# Altium PCB Antenna_915Mhz.PcbDoc
Units mil, origin at the board's own origin, x right, y up, seen from the top; angles counter-clockwise.
Board outline 1782 x 1899 mil, 2 copper layers (Top Layer, Bottom Layer); 5 components, 3 nets, 12 pads, 80 vias.
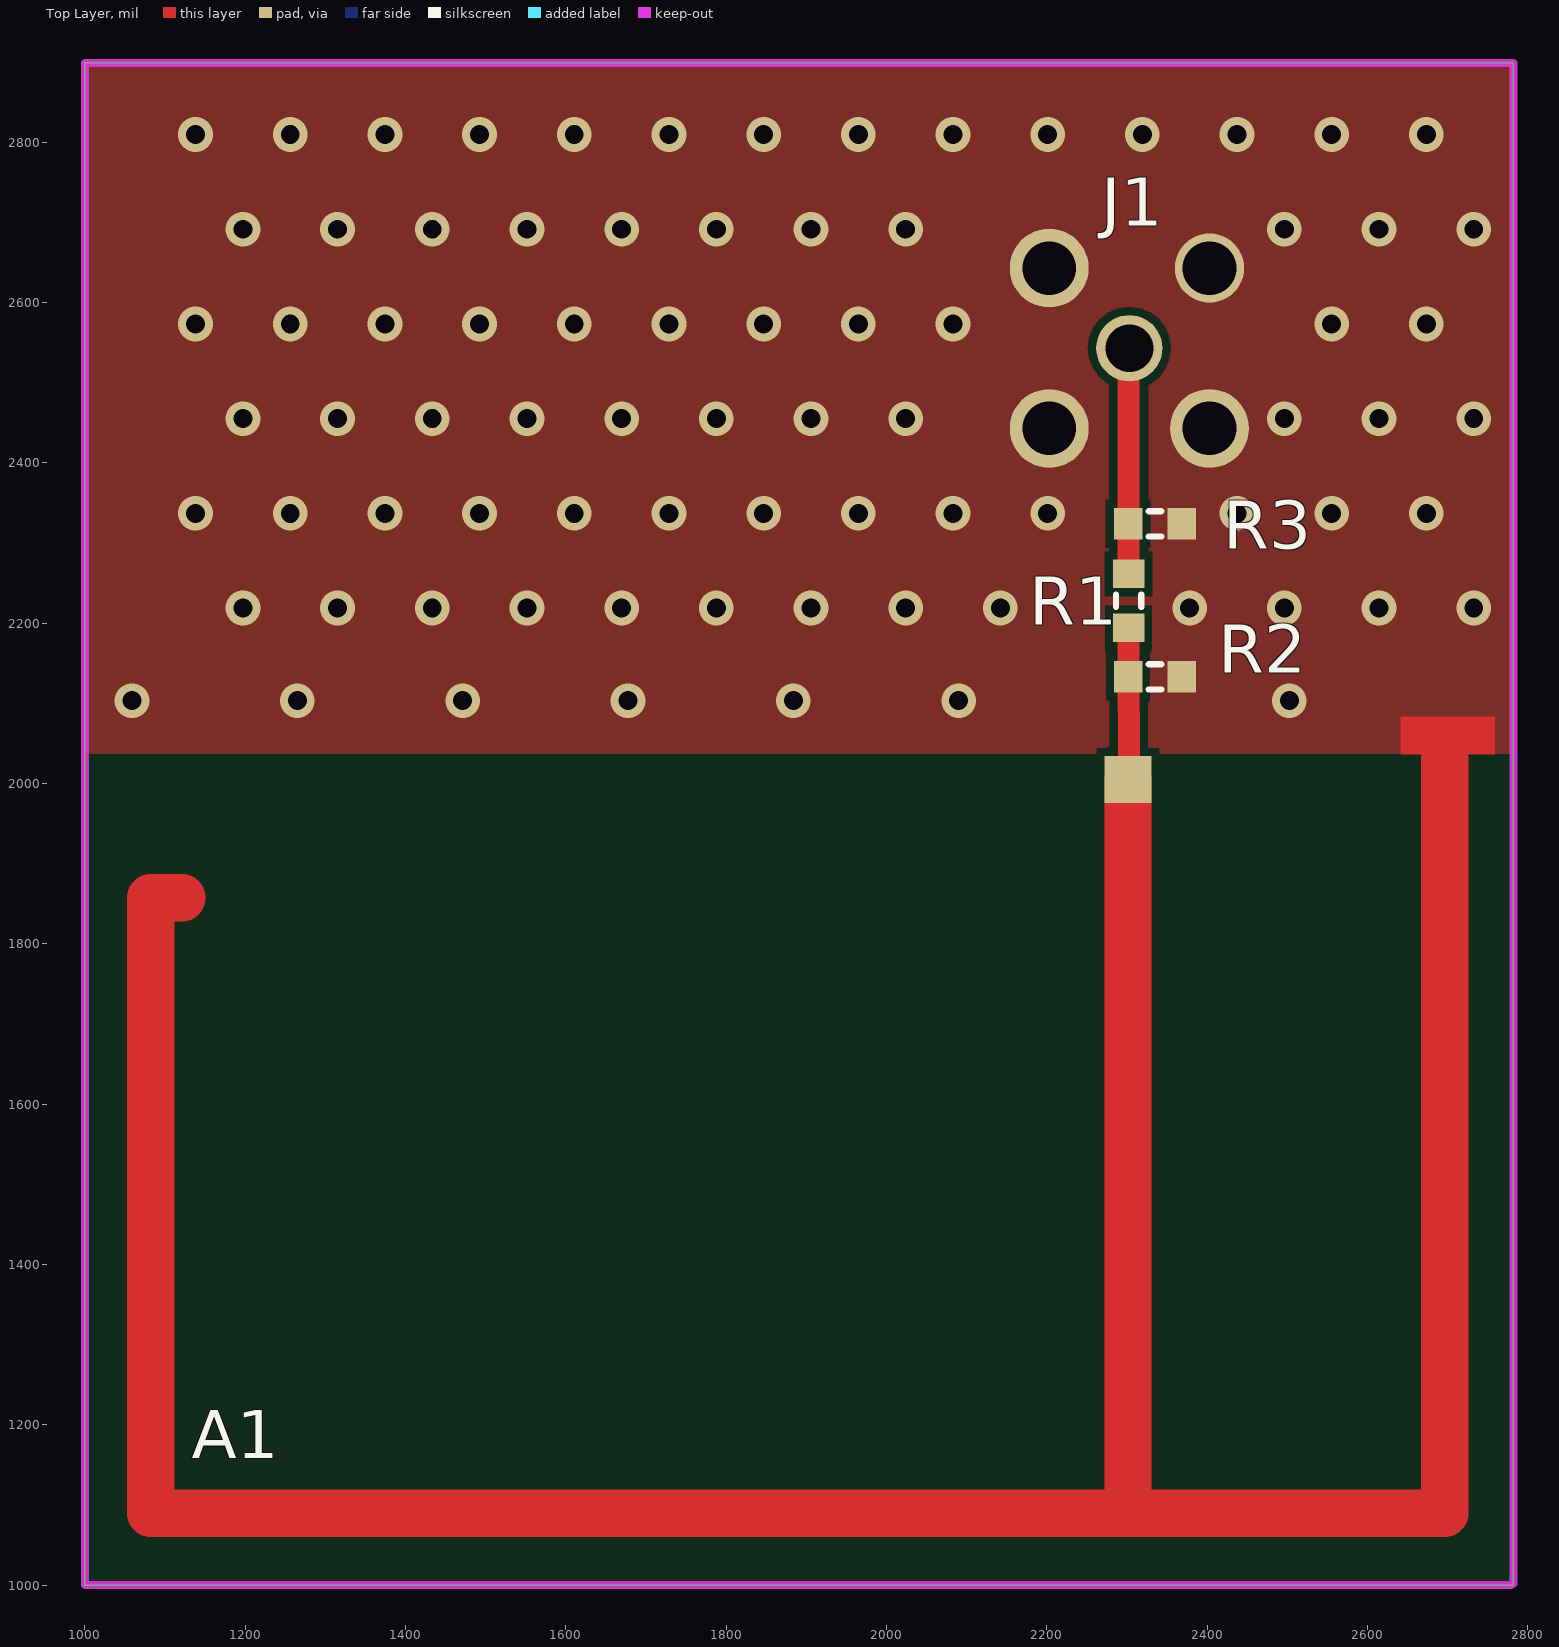
[diagram p0: Top Layer view]
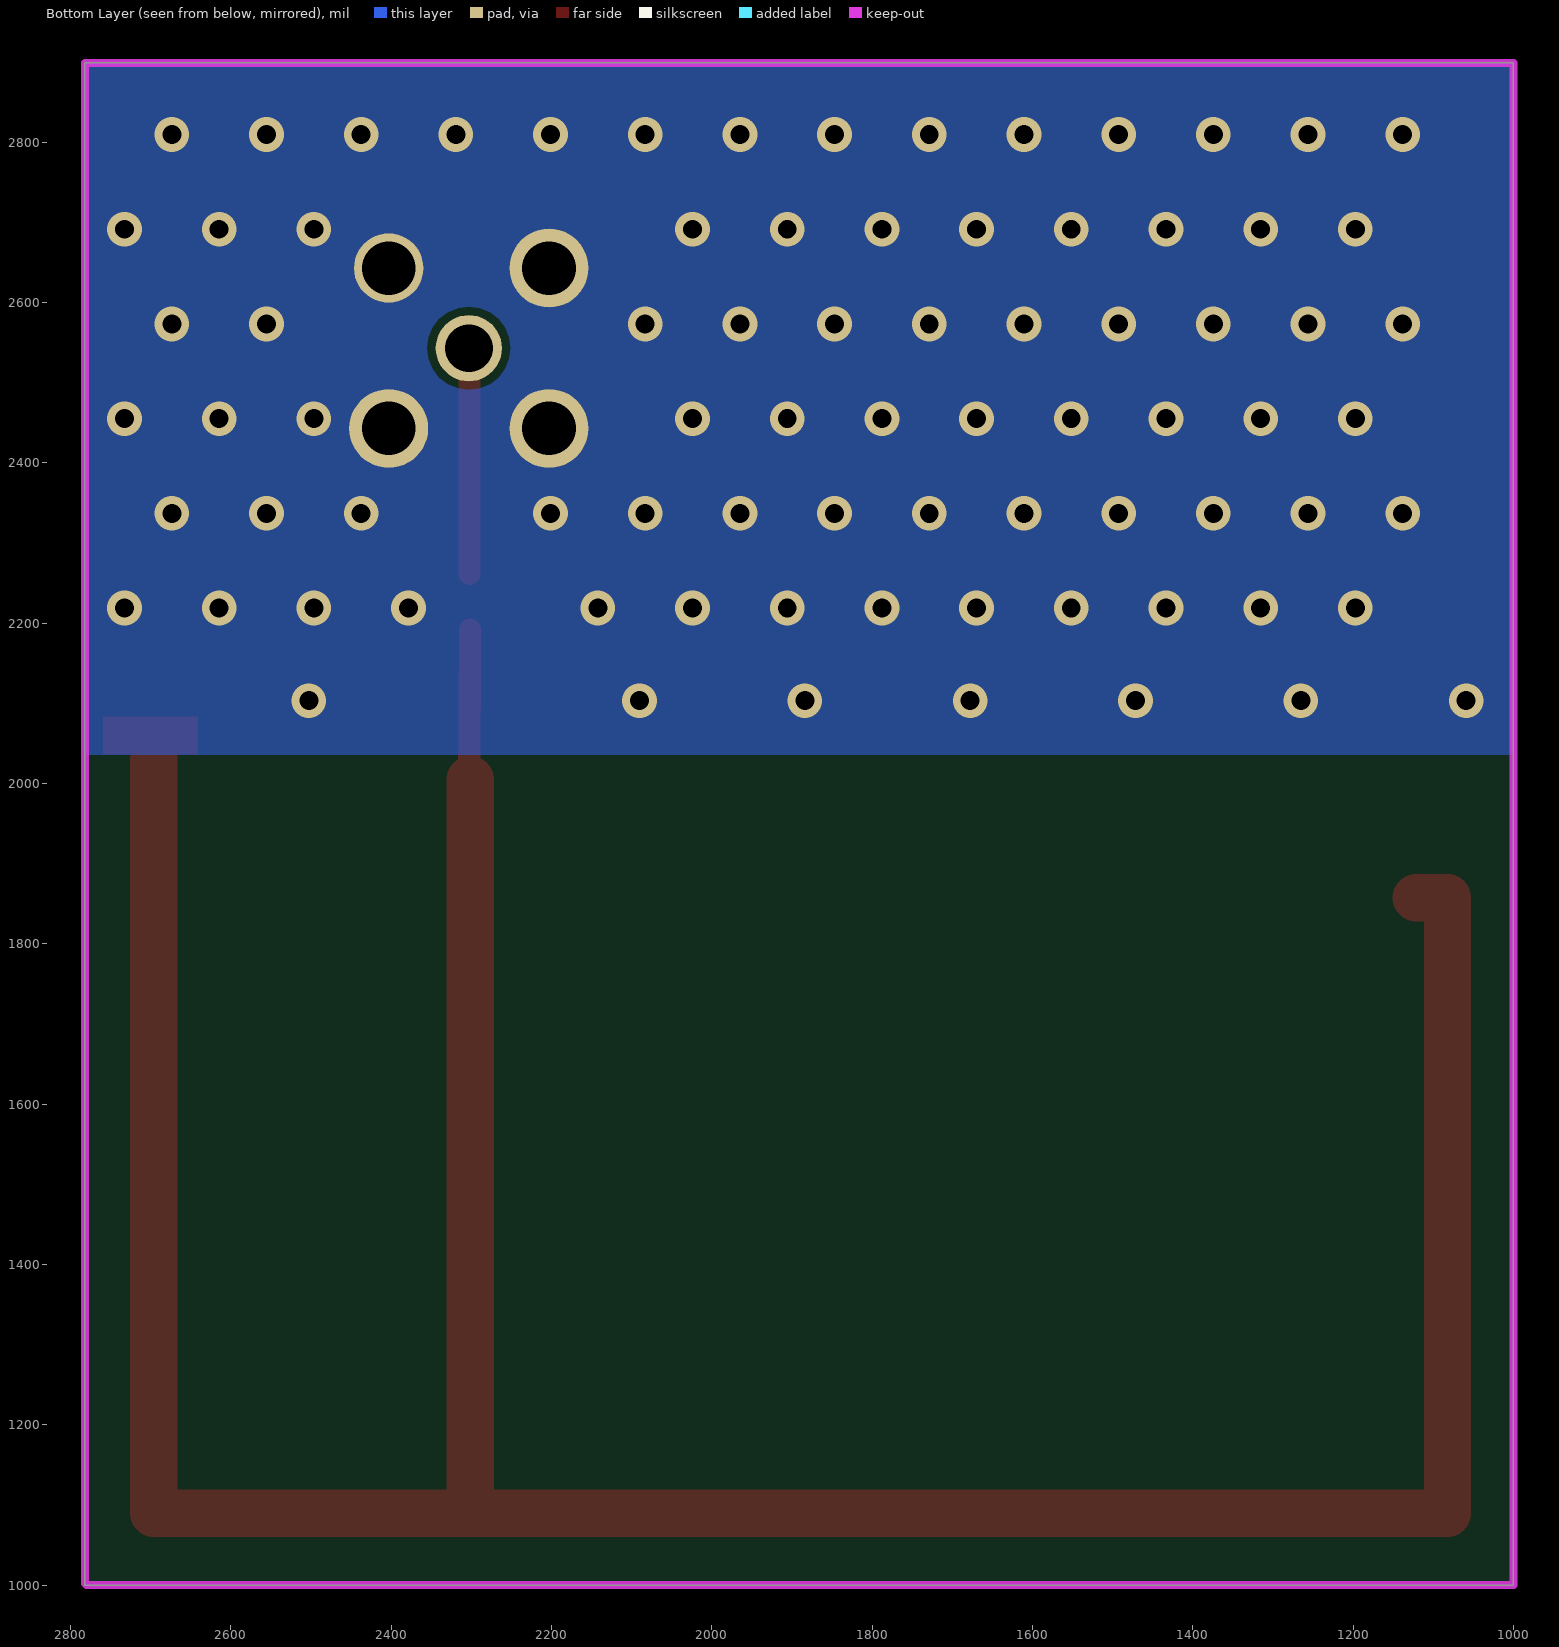
[diagram p1: Bottom Layer view, seen from below]

## Layer stack, top to bottom
Top Solder: solder mask 0.4, Solder Resist, Dk 3.5
Top Layer: signal copper 1.4
Dielectric 1: dielectric 12.6, FR-4, Dk 4.8
Bottom Layer: signal copper 1.4
Bottom Solder: solder mask 0.4, Solder Resist, Dk 3.5

## Board outline
1000,1000 2782,1000 2782,2899 1000,2899

## Design rules (kind name [scope] priority, off if disabled: settings)
Clearance [All] p1: gap=10 ignorepadtopadclearanceinfootprint=FALSE except(0: Arc-Hole Track-Hole SMDPad-Hole THPad-Hole Via-Hole Fill-Hole Poly-Hole Region-Hole Text-Hole)
PolygonConnect [All] p1: connectstyle=Direct reliefconductorwidth=10 reliefentries=4 polygonreliefangle="90 Angle" airgapwidth=10
RoutingVias [All] p1: holewidth=28 width=50 viastyle="Through Hole" minholewidth=28 minwidth=50 maxholewidth=28 maxwidth=50
SilkToSolderMaskClearance [IsPad] p1: minsilkscreentomaskgap=1 clearancetoexposedcopper=TRUE
SolderMaskExpansion [All] p1: expansion=4
Width [All] p1: maxlimit=100 minlimit=10 preferedwidth=10 minimp=50.000000 maximp=50.000000 favimp=50.000000
29 further rules are at their usual default settings.

## Components (designator, comment, footprint, x,y, rotation, side; value= is the part's Value field where it differs from the comment)
A1 "Antenna" "LORA ANT" 2696.24,2004.94 r180 top
J1 "221789-1" "SMA 221789-1" 2203,2443 r0 top
R1 "0R" RESC1608N 2302,2228 r270 top
R2 "0R" RESC1608N 2335,2133 r180 top
R3 "0R" RESC1608N 2335,2324 r180 top

## Footprints (in the part's own frame and the unit in brackets; to place one, negate y for a bottom-side part, rotate by r counter-clockwise, add the part's x,y. Pads: shape width x height; smd on the part's side, far side on the other; paste and mask are expansions set on the pad)
"LORA ANT" [mm]
  rect 1.5x1.5 smd: 1(10.033,0)
  Top Layer lines w1.5: 40.005,3.75 41,3.75 41,23.25 0,23.25 0,-0.635 ; 10.033,23.25 10.033,0
RESC1608N [mm] "Chip Resistor, Body 1.6x0.8mm, IPC Medium Density"
  rect 0.9x1 smd: 1(-0.85,0) 2(0.85,0)
  silkscreen extent -0.2,-0.4 0.2,0.4, body extent -0.85,-0.48 0.85,0.48, height 0.6
"SMA 221789-1" [mm] "CONN SMA JACK STR 50 OHM PCB"
  round 2.1 hole 1.52: 1(2.54,2.54)
  round 2.5 hole 1.7: 2(0,0) 3(0,5.08)
  round 2.2 hole 1.7: 4(5.08,5.08)
  round 2.5 hole 1.7 mask+0.102: 5(5.08,0)
  body extent -0.63,-0.63 5.72,5.72, height 9.53

## Part data
A1: "PCB Antenna"
J1: library part "SMA 221789-1", "CONN SMA JACK STR 50 OHM PCB", Supplier Part Number 1=A24691-ND, Supplier 1=Digi-Key
R1 R2 R3: library part R_Dup2, "SMT PART 0603"

## Via types
v1: diameter 43.31, hole 23.62, Top Layer to Bottom Layer, tented both sides, 80 vias

## Nets (pads, with @x,y where several pads share a name; then routed paths per layer and width w, separated by ;. In a path a pad name is that pad's centre, name@x,y a point inside that pad or via, vN(x,y) a via of type N, cw(c..) or ccw(c..) an arc to the next point about the centre after c; other vN are vias at no path point)
GND: J1.2 J1.3 J1.4 J1.5 R2.1 R3.1
  other v1: 1058.83,2103.37 1265.08,2103.37 1471.33,2103.37 1677.58,2103.37 1883.83,2103.37 2090.08,2103.37 2502.58,2103.37 1197.15,2218.98 1315.26,2218.98 1433.37,2218.98 1551.48,2218.98 1669.59,2218.98 1787.7,2218.98 1905.81,2218.98 2023.92,2218.98 2142.03,2218.98 2378.25,2218.98 2496.36,2218.98 2614.47,2218.98 2732.58,2218.98 1138.09,2337.09 1256.2,2337.09 1374.31,2337.09 1492.42,2337.09 1610.53,2337.09 1728.64,2337.09 1846.76,2337.09 1964.87,2337.09 2082.98,2337.09 2201.09,2337.09 2437.31,2337.09 2555.42,2337.09 2673.53,2337.09 1197.15,2455.2 1315.26,2455.2 1433.37,2455.2 1551.48,2455.2 1669.59,2455.2 1787.7,2455.2 1905.81,2455.2 2023.92,2455.2 2496.36,2455.2 2614.47,2455.2 2732.58,2455.2 1138.09,2573.31 1256.2,2573.31 1374.31,2573.31 1492.42,2573.31 1610.53,2573.31 1728.64,2573.31 1846.76,2573.31 1964.87,2573.31 2082.98,2573.31 2555.42,2573.31 2673.53,2573.31 1197.15,2691.42 1315.26,2691.42 1433.37,2691.42 1551.48,2691.42 1669.59,2691.42 1787.7,2691.42 1905.81,2691.42 2023.92,2691.42 2496.36,2691.42 2614.47,2691.42 2732.58,2691.42 1138.09,2809.53 1256.2,2809.53 1374.31,2809.53 1492.42,2809.53 1610.53,2809.53 1728.64,2809.53 1846.76,2809.53 1964.87,2809.53 2082.98,2809.53 2201.09,2809.53 2319.2,2809.53 2437.31,2809.53 2555.42,2809.53 2673.53,2809.53
NetA1_1: A1.1 R1.2 R2.2 | length 202.8
  Top Layer w27.56: R1.2@2301.79,2192 A1.1@2302.54,1989.2
NetJ1_1: J1.1 R1.1 R3.2 | length 283.5
  Top Layer w27.56: R1.1 J1.1@2302,2545

## Polygon pours and split planes (outlines as drawn)
GND on Bottom Layer "Bot_GND" (solid, remove dead copper, pour order 0): 1000.08,2898.65 1000.08,2129 1000.08,2036 2781.92,2036 2781.92,2898.65
GND on Top Layer "Top_GND" (solid, remove dead copper, pour order 2): 1000.08,2898.65 1000.08,2129 1000.08,2037 2781.92,2037 2781.92,2898.65

## Keep-outs
Keep-Out Layer:
  lines w10: 2780,1000 1000,1000 1000,2899 2782,2899 2782,1002

## Other copper
Top Layer:
  rectangle net GND: 2641.12,2036.44 2759.23,2083.68

## Silkscreen, mask and mechanical layers (free items; w line width, h text height)
Drill Drawing:
  lines w10: 1000,1000 2780,1000 2782,1002 2782,2899 1000,2899 1000,1000